# EAGLE board CT_schematic (EAGLE 7.6.0)

Size 100 x 80 mm. Coordinates in mm from the lower left corner, seen from the top.
Outline: 0,0 100,0 100,80 0,80 0,0
Copper layers (1*16): Top 0.035mm / dielectric 1.5mm / Bottom 0.035mm
Design rules "default": minimum track width 10mil, minimum drill 24mil, track to track 8mil, track to pad 8mil, pad to pad 8mil, via to via 8mil, smd to smd 8mil, copper to edge 40mil, drill to drill 8mil, minimum pad ring 10mil, minimum via ring 8mil, stop-mask expansion 4mil, vias tented up to drill 0mil, thermal gap 10mil

## Footprints (pad centres in the part's own frame; a part is rotated, then mirrored left to right if it is on the bottom)
C0603 = smd 0.8 x 0.8: 1 -0.762,0; 2 0.762,0
C0402 = smd 0.5 x 0.5: 1 -0.508,0; 2 0.508,0
C1210 = smd 1.2 x 2.5: 1 -1.524,0; 2 1.524,0
C1206 = smd 1.3 x 1.6: 1 -1.524,0; 2 1.524,0
EXV-9B = smd 2.718 x 1.778: 1 -2.108,0; 2 2.108,0
EXV-9H = smd 3.505 x 1.676: 1 -2.857,0; 2 2.857,0
L0603 = smd 0.8 x 0.8: 1 -0.762,0; 2 0.762,0
DR1040 = smd 1.6 x 3.2: 1 -4.458,0; 2 4.458,0
PJ-037B_PACKAGE = drill 3.7 square: 1 12,0 | drill 3.2 square: 2 6,0
R0603 = smd 0.8 x 0.8: 1 -0.762,0; 2 0.762,0
LQFP176 = smd 0.3 x 1.2: 1 -10.75,-12.75; 2 -10.25,-12.75; 3 -9.75,-12.75; 4 -9.25,-12.75; 5 -8.75,-12.75; 6 -8.25,-12.75; 7 -7.75,-12.75; 8 -7.25,-12.75; 9 -6.75,-12.75; 10 -6.25,-12.75; 11 -5.75,-12.75; 12 -5.25,-12.75; 13 -4.75,-12.75; 14 -4.25,-12.75; 15 -3.75,-12.75; 16 -3.25,-12.75; 17 -2.75,-12.75; 18 -2.25,-12.75; 19 -1.75,-12.75; 20 -1.25,-12.75; 21 -0.75,-12.75; 22 -0.25,-12.75; 23 0.25,-12.75; 24 0.75,-12.75; 25 1.25,-12.75; 26 1.75,-12.75; 27 2.25,-12.75; 28 2.75,-12.75; 29 3.25,-12.75; 30 3.75,-12.75; 31 4.25,-12.75; 32 4.75,-12.75; 33 5.25,-12.75; 34 5.75,-12.75; 35 6.25,-12.75; 36 6.75,-12.75; 37 7.25,-12.75; 38 7.75,-12.75; 39 8.25,-12.75; 40 8.75,-12.75; 41 9.25,-12.75; 42 9.75,-12.75; 43 10.25,-12.75; 44 10.75,-12.75; 89 10.75,12.75; 90 10.25,12.75; 91 9.75,12.75; 92 9.25,12.75; 93 8.75,12.75; 94 8.25,12.75; 95 7.75,12.75; 96 7.25,12.75; 97 6.75,12.75; 98 6.25,12.75; 99 5.75,12.75; 100 5.25,12.75; 101 4.75,12.75; 102 4.25,12.75; 103 3.75,12.75; 104 3.25,12.75; 105 2.75,12.75; 106 2.25,12.75; 107 1.75,12.75; 108 1.25,12.75; 109 0.75,12.75; 110 0.25,12.75; 111 -0.25,12.75; 112 -0.75,12.75; 113 -1.25,12.75; 114 -1.75,12.75; 115 -2.25,12.75; 116 -2.75,12.75; 117 -3.25,12.75; 118 -3.75,12.75; 119 -4.25,12.75; 120 -4.75,12.75; 121 -5.25,12.75; 122 -5.75,12.75; 123 -6.25,12.75; 124 -6.75,12.75; 125 -7.25,12.75; 126 -7.75,12.75; 127 -8.25,12.75; 128 -8.75,12.75; 129 -9.25,12.75; 130 -9.75,12.75; 131 -10.25,12.75; 132 -10.75,12.75 | smd 1.2 x 0.3: 45 12.75,-10.75; 46 12.75,-10.25; 47 12.75,-9.75; 48 12.75,-9.25; 49 12.75,-8.75; 50 12.75,-8.25; 51 12.75,-7.75; 52 12.75,-7.25; 53 12.75,-6.75; 54 12.75,-6.25; 55 12.75,-5.75; 56 12.75,-5.25; 57 12.75,-4.75; 58 12.75,-4.25; 59 12.75,-3.75; 60 12.75,-3.25; 61 12.75,-2.75; 62 12.75,-2.25; 63 12.75,-1.75; 64 12.75,-1.25; 65 12.75,-0.75; 66 12.75,-0.25; 67 12.75,0.25; 68 12.75,0.75; 69 12.75,1.25; 70 12.75,1.75; 71 12.75,2.25; 72 12.75,2.75; 73 12.75,3.25; 74 12.75,3.75; 75 12.75,4.25; 76 12.75,4.75; 77 12.75,5.25; 78 12.75,5.75; 79 12.75,6.25; 80 12.75,6.75; 81 12.75,7.25; 82 12.75,7.75; 83 12.75,8.25; 84 12.75,8.75; 85 12.75,9.25; 86 12.75,9.75; 87 12.75,10.25; 88 12.75,10.75; 133 -12.75,10.75; 134 -12.75,10.25; 135 -12.75,9.75; 136 -12.75,9.25; 137 -12.75,8.75; 138 -12.75,8.25; 139 -12.75,7.75; 140 -12.75,7.25; 141 -12.75,6.75; 142 -12.75,6.25; 143 -12.75,5.75; 144 -12.75,5.25; 145 -12.75,4.75; 146 -12.75,4.25; 147 -12.75,3.75; 148 -12.75,3.25; 149 -12.75,2.75; 150 -12.75,2.25; 151 -12.75,1.75; 152 -12.75,1.25; 153 -12.75,0.75; 154 -12.75,0.25; 155 -12.75,-0.25; 156 -12.75,-0.75; 157 -12.75,-1.25; 158 -12.75,-1.75; 159 -12.75,-2.25; 160 -12.75,-2.75; 161 -12.75,-3.25; 162 -12.75,-3.75; 163 -12.75,-4.25; 164 -12.75,-4.75; 165 -12.75,-5.25; 166 -12.75,-5.75; 167 -12.75,-6.25; 168 -12.75,-6.75; 169 -12.75,-7.25; 170 -12.75,-7.75; 171 -12.75,-8.25; 172 -12.75,-8.75; 173 -12.75,-9.25; 174 -12.75,-9.75; 175 -12.75,-10.25; 176 -12.75,-10.75
ARDUCAM = drill 1 pad 1.8 square: 1 0,0 | drill 1 pad 1.8: 2 0,2.54; 3 2.54,0; 4 2.54,2.54; 5 5.08,0; 6 5.08,2.54; 7 7.62,0; 8 7.62,2.54; 9 10.16,0; 10 10.16,2.54; 11 12.7,0; 12 12.7,2.54; 13 15.24,0; 14 15.24,2.54; 15 17.78,0; 16 17.78,2.54; 17 20.32,0; 18 20.32,2.54; 19 22.86,0; 20 22.86,2.54
SAMTEC_FTSH-105-01-L-DV-K = smd 0.762 x 2.794: 1 -2.54,-2.032; 2 -2.54,2.032; 3 -1.27,-2.032; 4 -1.27,2.032; 5 0,-2.032; 6 0,2.032; 7 1.27,-2.032; 8 1.27,2.032; 9 2.54,-2.032; 10 2.54,2.032
TDFN-8/6MM = smd 0.3 x 0.75: 1 0,0; 2 0.5,0; 3 1,0; 4 1.5,0; 5 1.5,3; 6 1,3; 7 0.5,3; 8 0,3
RHB32_3P45X3P45 = smd 0.85 x 0.28: 1 -2.475,1.75; 2 -2.475,1.25; 3 -2.475,0.75; 4 -2.475,0.25; 5 -2.475,-0.25; 6 -2.475,-0.75; 7 -2.475,-1.25; 8 -2.475,-1.75; 17 2.475,-1.75; 18 2.475,-1.25; 19 2.475,-0.75; 20 2.475,-0.25; 21 2.475,0.25; 22 2.475,0.75; 23 2.475,1.25; 24 2.475,1.75 | smd 0.28 x 0.85: 9 -1.75,-2.475; 10 -1.25,-2.475; 11 -0.75,-2.475; 12 -0.25,-2.475; 13 0.25,-2.475; 14 0.75,-2.475; 15 1.25,-2.475; 16 1.75,-2.475; 25 1.75,2.475; 26 1.25,2.475; 27 0.75,2.475; 28 0.25,2.475; 29 -0.25,2.475; 30 -0.75,2.475; 31 -1.25,2.475; 32 -1.75,2.475 | smd 3.45 x 3.45: 33 0,0
MICRO_USB_AB = smd 0.4 x 1.35: 1 1.3,0.26; 2 0.65,0.26; 3 0,0.26; 4 -0.65,0.26; 5 -1.3,0.26 | drill 0.6 pad 0.95 long: 6 4.175,-2.54; 7 -4.175,-2.54 | drill 0.7 pad 1.1 long: 8 -2.225,0.46; 9 2.225,0.46
SOT143B = smd 1 x 0.7: 1 -0.75,-1 | smd 0.6 x 0.7: 2 0.95,-1; 3 0.95,1; 4 -0.95,1
SOT-23-6 = smd 1.1 x 0.6: 1 -1.4,0.95; 2 -1.4,0; 3 -1.4,-0.95; 4 1.4,-0.95; 5 1.4,0; 6 1.4,0.95
ASEK = smd 1.4 x 1: 1 -1.1,-0.8; 2 1.1,-0.8; 3 1.1,0.8; 4 -1.1,0.8
ASFL1 = smd 1.7 x 1.5: 1 -1.27,-1.1; 2 1.27,-1.1; 3 1.27,1.1; 4 -1.27,1.1
IDT74FCT38072 = smd 0.51 x 1: 1 0,0; 2 1.27,0; 3 2.54,0; 4 3.81,0; 5 3.81,4.95; 6 2.54,4.95; 7 1.27,4.95; 8 0,4.95
HTSSOP14 = smd 1.676 x 0.356: 1 -2.8,1.95; 2 -2.8,1.3; 3 -2.8,0.65; 4 -2.8,0; 5 -2.8,-0.65; 6 -2.8,-1.3; 7 -2.8,-1.95; 8 2.8,-1.95; 9 2.8,-1.3; 10 2.8,-0.65; 11 2.8,0; 12 2.8,0.65; 13 2.8,1.3; 14 2.8,1.95 | smd 3 x 5: 15 0,0 | drill 0.4 pad 0.45: P$1 -0.75,1.5; P$2 0.75,1.5; P$3 -0.75,0; P$4 0.8,0; P$5 -0.75,-1.5; P$6 0.9,-1.5
LP2954 = smd 1.6 x 0.6: 1 -2.475,1.905 | smd 1.55 x 0.6: 2 -2.475,0.635; 3 -2.475,-0.635; 4 -2.475,-1.905; 5 2.475,-1.905; 6 2.475,-0.635; 7 2.475,0.635; 8 2.475,1.905
WSON-8 = smd 0.3 x 0.6: 1 -0.75,0; 2 0.05,0; 3 0.85,0; 4 1.65,0; 5 1.65,3.8; 6 0.85,3.8; 7 0.05,3.8; 8 -0.75,3.8 | smd 3 x 2.6: PAD 0.45,1.9
SON-6 = smd 0.55 x 0.3: 1 -0.355,0.5 | smd 0.52 x 0.3: 2 -0.37,0; 3 -0.37,-0.5; 4 0.37,-0.5; 5 0.37,0; 6 0.37,0.5
SW_4-1437565-2 = smd 1.4 x 2.1: 1 -2.23,4.55; 2 -2.23,-4.55; 3 2.23,4.55; 4 2.23,-4.55
LGM67K-G1J2-24-Z = smd 0.8 x 1.4: A -2,0; C 0,0
NC7SZ125M5X = smd 1.3 x 0.7: 1 -1.3,0.95; 2 -1.3,0; 3 -1.3,-0.95; 4 1.3,-0.95; 5 1.3,0.95
DUMMY_PACKAGE_251 = drill 0.3: 1 0,-1; 2 1.5,-1

## Placement (x,y rotation side)
C1  1e-06  [C0603]  -78.74,78.74 0 top  (outside the outline)
C2  1e-07  [C0603]  -82.55,78.74 0 top  (outside the outline)
C3  1e-07  [C0603]  -86.36,78.74 0 top  (outside the outline)
C4  1e-07  [C0603]  -15.24,83.82 0 top  (outside the outline)
C5  1e-07  [C0603]  -19.05,83.82 0 top  (outside the outline)
C6  1e-07  [C0603]  -22.86,83.82 0 top  (outside the outline)
C7  1e-07  [C0603]  -26.67,83.82 0 top  (outside the outline)
C8  1e-07  [C0603]  -30.48,83.82 0 top  (outside the outline)
C9  1e-07  [C0603]  -34.29,83.82 0 top  (outside the outline)
C10  1e-07  [C0603]  -38.1,83.82 0 top  (outside the outline)
C11  1e-07  [C0603]  -41.91,83.82 0 top  (outside the outline)
C12  1e-07  [C0603]  -45.72,83.82 0 top  (outside the outline)
C13  1e-07  [C0603]  -49.53,83.82 0 top  (outside the outline)
C14  1e-07  [C0603]  -53.34,83.82 0 top  (outside the outline)
C15  1e-07  [C0603]  -57.15,83.82 0 top  (outside the outline)
C16  1e-07  [C0603]  -60.96,83.82 0 top  (outside the outline)
C17  1e-07  [C0603]  -64.77,83.82 0 top  (outside the outline)
C18  4.7e-06  [C0603]  -59.69,78.74 0 top  (outside the outline)
C19  1e-08  [C0603]  -68.58,83.82 0 top  (outside the outline)
C20  1e-06  [C0603]  -72.39,83.82 0 top  (outside the outline)
C21  1e-07  [C0603]  -76.2,83.82 0 top  (outside the outline)
C22  1e-07  [C0603]  -80.01,83.82 0 top  (outside the outline)
C23  2.2e-06  [C0603]  -63.5,78.74 0 top  (outside the outline)
C24  2.2e-06  [C0603]  -67.31,78.74 0 top  (outside the outline)
C25  1e-06  [C0603]  -83.82,83.82 0 top  (outside the outline)
C26  1e-07  [C0402]  -62.23,88.9 0 top  (outside the outline)
C27  1e-08  [C0402]  -66.04,88.9 0 top  (outside the outline)
C28  1e-07  [C0402]  -69.85,88.9 0 top  (outside the outline)
C29  2.2e-06  [C0603]  -71.12,78.74 0 top  (outside the outline)
C30  1e-07  [C0402]  -73.66,88.9 0 top  (outside the outline)
C31  1e-07  [C0402]  -77.47,88.9 0 top  (outside the outline)
C32  2.2e-06  [C0603]  -74.93,78.74 0 top  (outside the outline)
C33  1e-06  [C0603]  -87.63,83.82 0 top  (outside the outline)
C34  1e-08  [C0402]  -81.28,88.9 0 top  (outside the outline)
C35  1e-08  [C0402]  -85.09,88.9 0 top  (outside the outline)
C36  1e-08  [C0402]  -15.24,93.98 0 top  (outside the outline)
C37  1e-08  [C0402]  -19.05,93.98 0 top  (outside the outline)
C38  1e-06  [C0603]  -15.24,88.9 0 top  (outside the outline)
C39  3.3e-09  [C0402]  -58.42,88.9 0 top  (outside the outline)
C40  1e-07  [C0402]  -22.86,93.98 0 top  (outside the outline)
C41  2.2e-05  [C1210]  -68.58,60.96 0 top  (outside the outline)
C42  2.2e-05  [C1210]  -74.93,60.96 0 top  (outside the outline)
C43  1e-05  [C1206]  -16.51,68.58 0 top  (outside the outline)
C44  1e-05  [C1206]  -22.86,68.58 0 top  (outside the outline)
C45  1e-06  [EXV-9B]  -36.83,67.31 0 top  (outside the outline)
C46  2.2e-06  [EXV-9B]  -45.72,67.31 0 top  (outside the outline)
C47  1e-08  [C0402]  -26.67,93.98 0 top  (outside the outline)
C48  1e-05  [C1206]  -29.21,68.58 0 top  (outside the outline)
C49  1e-05  [C1210]  -81.28,60.96 0 top  (outside the outline)
C50  1e-07  [C0402]  -30.48,93.98 0 top  (outside the outline)
C51  0.0001  [EXV-9H]  -38.1,53.34 0 top  (outside the outline)
C52  0.0001  [EXV-9H]  -49.53,53.34 0 top  (outside the outline)
C53  1e-08  [C0402]  -34.29,93.98 0 top  (outside the outline)
C54  1e-08  [C0402]  -38.1,93.98 0 top  (outside the outline)
C55  1e-08  [C0402]  -41.91,93.98 0 top  (outside the outline)
C56  1e-08  [C0402]  -45.72,93.98 0 top  (outside the outline)
F1  240.0  [L0603]  -19.05,88.9 0 top  (outside the outline)
I1  5.2e-06  [DR1040]  -50.8,33.02 0 top  (outside the outline)
J1  PJ-037B  [PJ-037B_PACKAGE]  -85.09,7.62 0 top  (outside the outline)
R2  1000.0  [R0603]  -22.86,88.9 0 top  (outside the outline)
R7  4700.0  [R0603]  -26.67,88.9 0 top  (outside the outline)
R8  4700.0  [R0603]  -30.48,88.9 0 top  (outside the outline)
R9  4700.0  [R0603]  -34.29,88.9 0 top  (outside the outline)
R10  2200.0  [R0603]  -38.1,88.9 0 top  (outside the outline)
R12  2200.0  [R0603]  -41.91,88.9 0 top  (outside the outline)
R14  10000.0  [R0603]  -45.72,73.66 0 top  (outside the outline)
R15  10000.0  [R0603]  -50.8,73.66 0 top  (outside the outline)
R16  10000.0  [R0603]  -55.88,73.66 0 top  (outside the outline)
R17  10000.0  [R0603]  -60.96,73.66 0 top  (outside the outline)
R18  10000.0  [R0603]  -66.04,73.66 0 top  (outside the outline)
R19  10000.0  [R0603]  -71.12,73.66 0 top  (outside the outline)
R20  10000.0  [R0603]  -76.2,73.66 0 top  (outside the outline)
R21  5.0  [R0603]  -45.72,88.9 0 top  (outside the outline)
R22  10000.0  [R0603]  -81.28,73.66 0 top  (outside the outline)
R23  10000.0  [R0603]  -86.36,73.66 0 top  (outside the outline)
R24  10000.0  [R0603]  -15.24,78.74 0 top  (outside the outline)
R25  47000.0  [R0603]  -20.32,78.74 0 top  (outside the outline)
R26  10000.0  [R0603]  -25.4,78.74 0 top  (outside the outline)
R27  10000.0  [R0603]  -30.48,78.74 0 top  (outside the outline)
R28  30000.0  [R0603]  -35.56,78.74 0 top  (outside the outline)
R29  22000.0  [R0603]  -40.64,78.74 0 top  (outside the outline)
R30  100000.0  [R0603]  -15.24,73.66 0 top  (outside the outline)
R31  100000.0  [R0603]  -20.32,73.66 0 top  (outside the outline)
R32  164658.62  [R0603]  -85.09,67.31 0 top  (outside the outline)
R33  100000.0  [R0603]  -25.4,73.66 0 top  (outside the outline)
R34  100000.0  [R0603]  -30.48,73.66 0 top  (outside the outline)
R35  3900.0  [R0603]  -49.53,88.9 0 top  (outside the outline)
R36  1000.0  [R0603]  -53.34,88.9 0 top  (outside the outline)
R37  10000.0  [R0603]  -45.72,78.74 0 top  (outside the outline)
R38  10000.0  [R0603]  -50.8,78.74 0 top  (outside the outline)
R39  82000.0  [R0603]  -55.88,78.74 0 top  (outside the outline)
R40  300000.0  [R0603]  -35.56,73.66 0 top  (outside the outline)
R41  120000.0  [R0603]  -40.64,73.66 0 top  (outside the outline)
U1  STM32F765IIT6  [LQFP176]  -26.67,13.97 0 top  (outside the outline)
U2  arducam_ov2640  [ARDUCAM]  -40.64,58.42 0 top  (outside the outline)
U3  FTSH-105-01-L-DV-K  [SAMTEC_FTSH-105-01-L-DV-K]  -63.5,7.62 0 top  (outside the outline)
U4  24AA128T-I/MNY  [TDFN-8/6MM]  -68.58,31.75 0 top  (outside the outline)
U5  TUSB1210BRHBR  [RHB32_3P45X3P45]  -59.69,53.34 0 top  (outside the outline)
U6  47590-0001  [MICRO_USB_AB]  -20.32,35.56 0 top  (outside the outline)
U7  prtr5v0u2ax  [SOT143B]  -58.42,93.98 0 top  (outside the outline)
U8  MAX4995AAUT+T  [SOT-23-6]  -53.34,67.31 0 top  (outside the outline)
U9  ASEK-32.768KHz-ECST  [ASEK]  -29.21,53.34 0 top  (outside the outline)
U10  ASFL1-25MHZ-NCS  [ASFL1]  -46.99,44.45 0 top  (outside the outline)
U11  idt74fct38072  [IDT74FCT38072]  -83.82,41.91 0 top  (outside the outline)
U12  ASFL1-26MHZ-NCS  [ASFL1]  -63.5,44.45 0 top  (outside the outline)
U13  tps54225PWP  [HTSSOP14]  -48.26,60.96 0 top  (outside the outline)
U14  LP2954AIMX/NOPB  [LP2954]  -83.82,33.02 0 top  (outside the outline)
U15  LP3878SDX-ADJ/NOPB  [WSON-8]  -30.48,43.18 0 top  (outside the outline)
U16  TPS3895ADRYR  [SON-6]  -66.04,92.71 0 top  (outside the outline)
U17  4-1437565-2  [SW_4-1437565-2]  -40.64,34.29 0 top  (outside the outline)
U18  Q65110A2395  [LGM67K-G1J2-24-Z]  -57.15,60.96 0 top  (outside the outline)
U19  nc7sz125m5x  [NC7SZ125M5X]  -58.42,67.31 0 top  (outside the outline)
U20  nc7sz125m5x  [NC7SZ125M5X]  -64.77,67.31 0 top  (outside the outline)
U21  nc7sz125m5x  [NC7SZ125M5X]  -71.12,67.31 0 top  (outside the outline)
U22  nc7sz125m5x  [NC7SZ125M5X]  -77.47,67.31 0 top  (outside the outline)
U23  Dummy  [DUMMY_PACKAGE_251]  -63.5,93.98 0 top  (outside the outline)

## Library data of the parts
C1-C56 F1 I1 J1 R2 R7-R10 R12 R14-R41 U1-U23 = circuit_tree

## Nets
CLK_U1_9: U1.9 U9.3
CLK_U1_29: U1.29 U11.6
CLK_U2_8: U2.8 U11.7
CLK_U5_1: U5.1 U12.3
CLK_U11_3: U10.3 U11.3
GND: C1.2 C2.2 C3.2 C4.2 C5.2 C6.2 C7.2 C8.2 C9.2 C10.2 C11.2 C12.2 C13.2 C14.2 C15.2 C16.2 C17.2 C18.2 C19.2 C20.2 C21.2 C22.2 C23.2 C24.2 C25.2 C26.2 C27.2 C28.2 C29.2 C30.2 C31.2 C32.2 C33.2 C34.2 C35.2 C36.2 C37.2 C38.2 C39.2 C41.2 C42.2 C43.2 C44.2 C45.2 C46.2 C47.2 C48.2 C49.2 C50.2 C51.2 C52.2 C53.2 C54.2 C55.2 C56.2 J1.2 R2.2 R14.2 R16.2 R20.2 R21.2 R22.2 R23.2 R25.2 R29.2 R33.2 R36.2 R39.2 R41.2 U1.14 U1.22 U1.37 U1.61 U1.71 U1.90 U1.102 U1.113 U1.126 U1.135 U1.148 U1.158 U2.2 U2.20 U3.3 U3.5 U4.4 U4.7 U5.33 U6.5 U6.6 U6.7 U6.8 U6.9 U7.1 U8.2 U9.2 U10.2 U11.4 U11.5 U11.8 U12.2 U13.5 U13.8 U13.9 U13.15 U14.4 U15.3 U15.PAD U16.2 U18.C U19.2 U19.3 U20.1 U20.3 U21.1 U21.3 U22.1 U22.3 U23.1
NET_U1_31: R7.1 U1.31 U20.4
NET_U1_39: C19.1 C20.1 F1.1 U1.38 U1.39
NET_U1_48: R16.1 U1.48
NET_U1_81: C23.1 U1.81
NET_U1_125: C24.1 U1.125
NET_U1_164: R10.1 U1.164 U4.6
NET_U1_165: R12.1 U1.165 U4.5
NET_U1_166: R14.1 U1.166
NET_U1_171: R15.1 U1.171
NET_U1_175: U18.A
NET_U1_176: U17.3 U17.4
NET_U2_19: R8.1 U2.19 U21.4
NET_U3_9: R21.1 U3.9
NET_U4_1: R22.1 U4.1
NET_U4_2: R23.1 U4.2
NET_U4_3: R24.1 U4.3
NET_U5_11: R26.1 U5.11
NET_U5_12: C32.1 U5.12
NET_U5_14: R27.1 U5.14
NET_U5_20: C29.1 U5.20
NET_U5_27: R9.1 U5.27 U22.4
NET_U6_1: C33.1 U5.22 U6.1 U7.4 U8.1
NET_U6_2: U5.19 U6.2 U7.3
NET_U6_3: U5.18 U6.3 U7.2
NET_U6_4: U5.23 U6.4
NET_U8_3: R25.1 U8.3
NET_U8_4: U5.17 U8.4
NET_U13_2: R28.2 R29.1 U13.2
NET_U13_3: C38.1 U13.3
NET_U13_4: C39.1 U13.4
NET_U13_10: C40.1 I1.1 U13.10 U13.11
NET_U13_12: C40.2 U13.12
NET_U14_3: R31.1 U14.3
NET_U14_5: R30.1 U14.5
NET_U14_7: R32.2 R33.1 U14.7
NET_U15_1: C47.1 U15.1
NET_U15_6: R35.2 R36.1 U15.6
NET_U15_8: R34.1 U15.8
NET_U16_1: R38.1 R39.1 U16.1
NET_U16_3: R40.2 R41.1 U16.3
NET_U16_4: R37.1 U16.4 U19.4 U20.2 U21.2 U22.2
NET_U17_1: R2.1 U17.1 U17.2
PROC_DAC_OUT1: U1.50 U23.2
PROC_SYS_JTCK_SWCLK: R20.1 U1.137 U3.4
PROC_SYS_JTDI: R18.1 U1.138 U3.8
PROC_SYS_JTDO_SWO: U1.161 U3.6
PROC_SYS_JTMS_SWDIO: R19.1 U1.124 U3.2
PROC_USB_OTG_HS_ULPI_CK: U5.26
PROC_USB_OTG_HS_ULPI_D0: U5.3
PROC_USB_OTG_HS_ULPI_D1: U5.4
PROC_USB_OTG_HS_ULPI_D2: U5.5
PROC_USB_OTG_HS_ULPI_D3: U5.6
PROC_USB_OTG_HS_ULPI_D4: U5.7
PROC_USB_OTG_HS_ULPI_D5: U5.9
PROC_USB_OTG_HS_ULPI_D6: U5.10
PROC_USB_OTG_HS_ULPI_D7: U5.13
PROC_USB_OTG_HS_ULPI_DIR: U5.31
PROC_USB_OTG_HS_ULPI_NXT: U5.2
PROC_USB_OTG_HS_ULPI_STP: U5.29
RST_OUT_U3_JTAG_RST_B: R17.1 U3.10 U19.1
VCC_S1_8V1: C43.1 C44.1 C45.1 C48.1 C51.1 C52.1 J1.1 R31.2 R34.2 U13.7 U13.13 U13.14 U14.8 U15.4
VCC_TIER1_1V8: C1.1 C2.1 C3.1 C4.1 C5.1 C6.1 C7.1 C8.1 C9.1 C10.1 C11.1 C12.1 C13.1 C14.1 C15.1 C16.1 C17.1 C18.1 C22.1 C26.1 C27.1 C30.1 C31.1 C41.1 C42.1 C50.1 C53.1 C54.1 C55.1 C56.1 F1.2 I1.2 R7.2 R9.2 R10.2 R12.2 R15.2 R17.2 R18.2 R19.2 R24.2 R26.2 R27.2 R28.1 R37.2 R38.2 R40.1 U1.6 U1.15 U1.23 U1.36 U1.49 U1.62 U1.72 U1.82 U1.91 U1.103 U1.127 U1.136 U1.149 U1.159 U1.172 U3.1 U4.8 U5.28 U5.30 U5.32 U13.1 U16.6 U19.5 U20.5 U21.5 U22.5
VCC_TIER1_3V3: C21.1 C25.1 C28.1 C34.1 C35.1 C36.1 C37.1 C46.1 R8.2 R30.2 R32.1 U1.114 U2.1 U5.21 U9.4 U10.4 U11.1 U11.2 U12.4 U14.1
VCC_TIER1_5V0: C49.1 R35.1 U8.5 U15.5

## Tracks (layer width: path | path; a pad name or v marks a point on that pad's centre or on a via)
CLK_U1_9  (1 unrouted)
CLK_U1_29  (1 unrouted)
CLK_U2_8  (1 unrouted)
CLK_U5_1  (1 unrouted)
CLK_U11_3  (1 unrouted)
GND  (118 unrouted)
NET_U1_31  (2 unrouted)
NET_U1_39  (4 unrouted)
NET_U1_48  (1 unrouted)
NET_U1_81  (1 unrouted)
NET_U1_125  (1 unrouted)
NET_U1_164  (2 unrouted)
NET_U1_165  (2 unrouted)
NET_U1_166  (1 unrouted)
NET_U1_171  (1 unrouted)
NET_U1_176  (1 unrouted)
NET_U2_19  (2 unrouted)
NET_U3_9  (1 unrouted)
NET_U4_1  (1 unrouted)
NET_U4_2  (1 unrouted)
NET_U4_3  (1 unrouted)
NET_U5_11  (1 unrouted)
NET_U5_12  (1 unrouted)
NET_U5_14  (1 unrouted)
NET_U5_20  (1 unrouted)
NET_U5_27  (2 unrouted)
NET_U6_1  (4 unrouted)
NET_U6_2  (2 unrouted)
NET_U6_3  (2 unrouted)
NET_U6_4  (1 unrouted)
NET_U8_3  (1 unrouted)
NET_U8_4  (1 unrouted)
NET_U13_2  (2 unrouted)
NET_U13_3  (1 unrouted)
NET_U13_4  (1 unrouted)
NET_U13_10  (3 unrouted)
NET_U13_12  (1 unrouted)
NET_U14_3  (1 unrouted)
NET_U14_5  (1 unrouted)
NET_U14_7  (2 unrouted)
NET_U15_1  (1 unrouted)
NET_U15_6  (2 unrouted)
NET_U15_8  (1 unrouted)
NET_U16_1  (2 unrouted)
NET_U16_3  (2 unrouted)
NET_U16_4  (5 unrouted)
NET_U17_1  (2 unrouted)
PROC_DAC_OUT1  (1 unrouted)
PROC_SYS_JTCK_SWCLK  (2 unrouted)
PROC_SYS_JTDI  (2 unrouted)
PROC_SYS_JTDO_SWO  (1 unrouted)
PROC_SYS_JTMS_SWDIO  (2 unrouted)
RST_OUT_U3_JTAG_RST_B  (2 unrouted)
VCC_S1_8V1  (13 unrouted)
VCC_TIER1_1V8  (72 unrouted)
VCC_TIER1_3V3  (19 unrouted)
VCC_TIER1_5V0  (3 unrouted)